# EAGLE board vga_fpga (EAGLE 9.3.0)
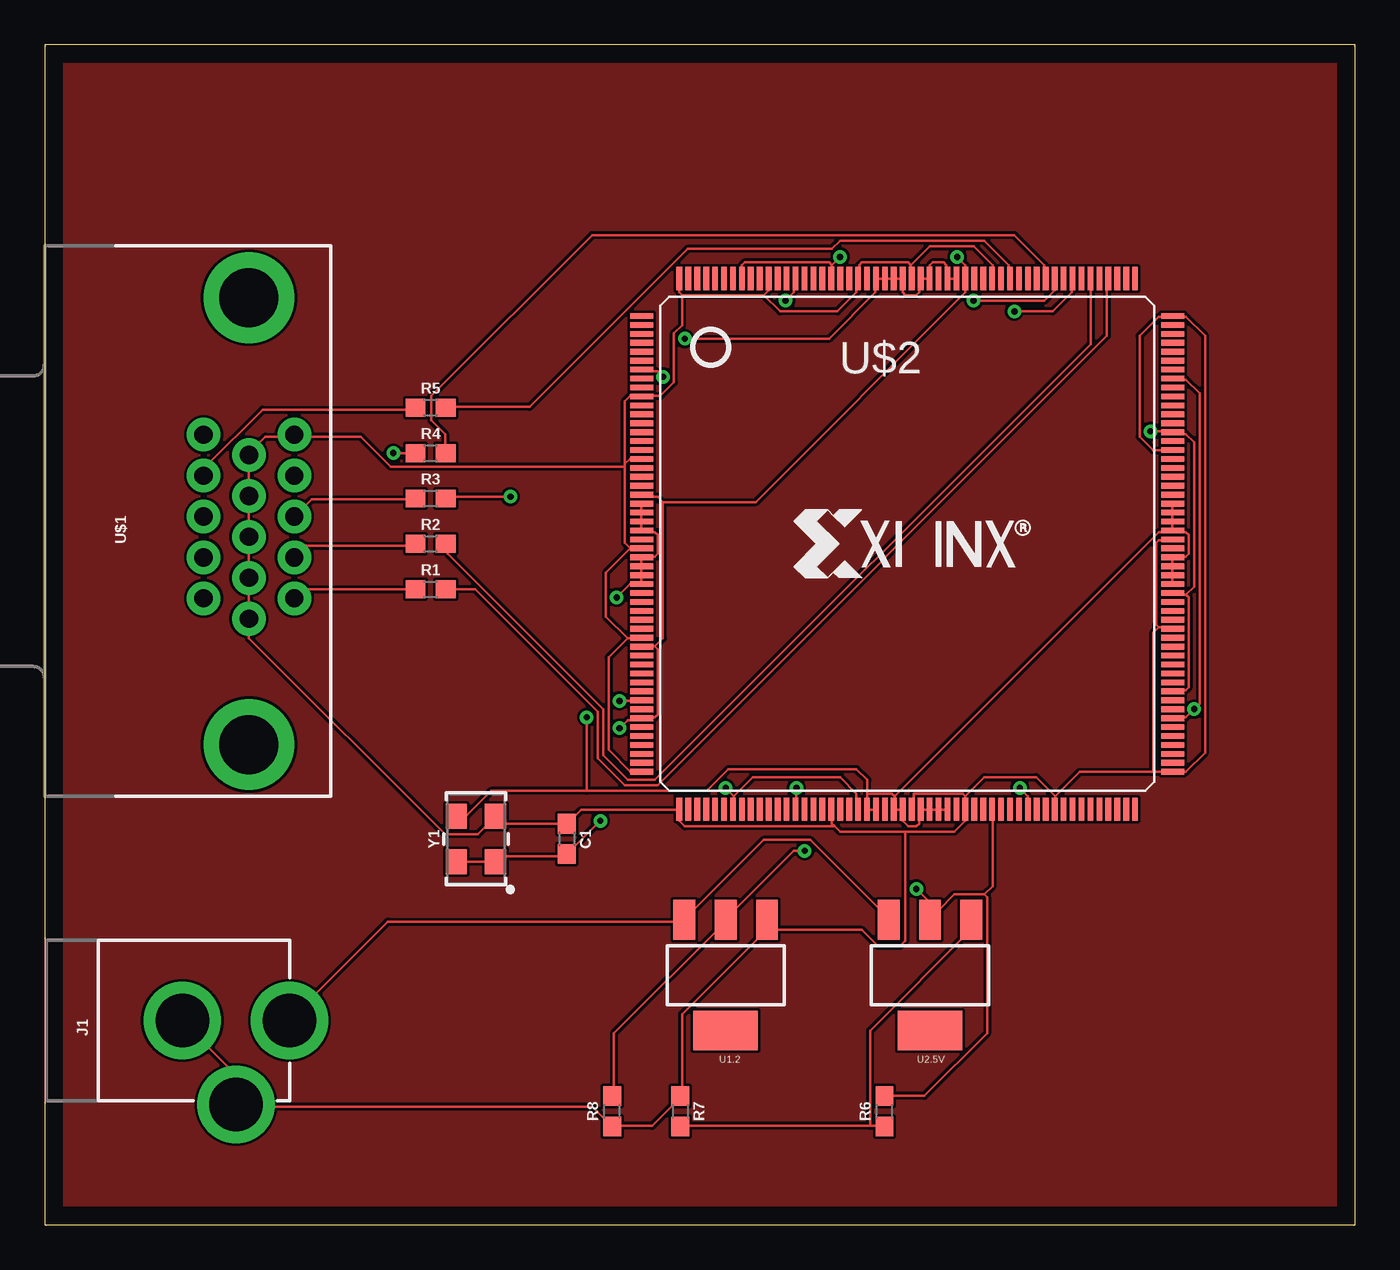
[diagram p0: board, top side]
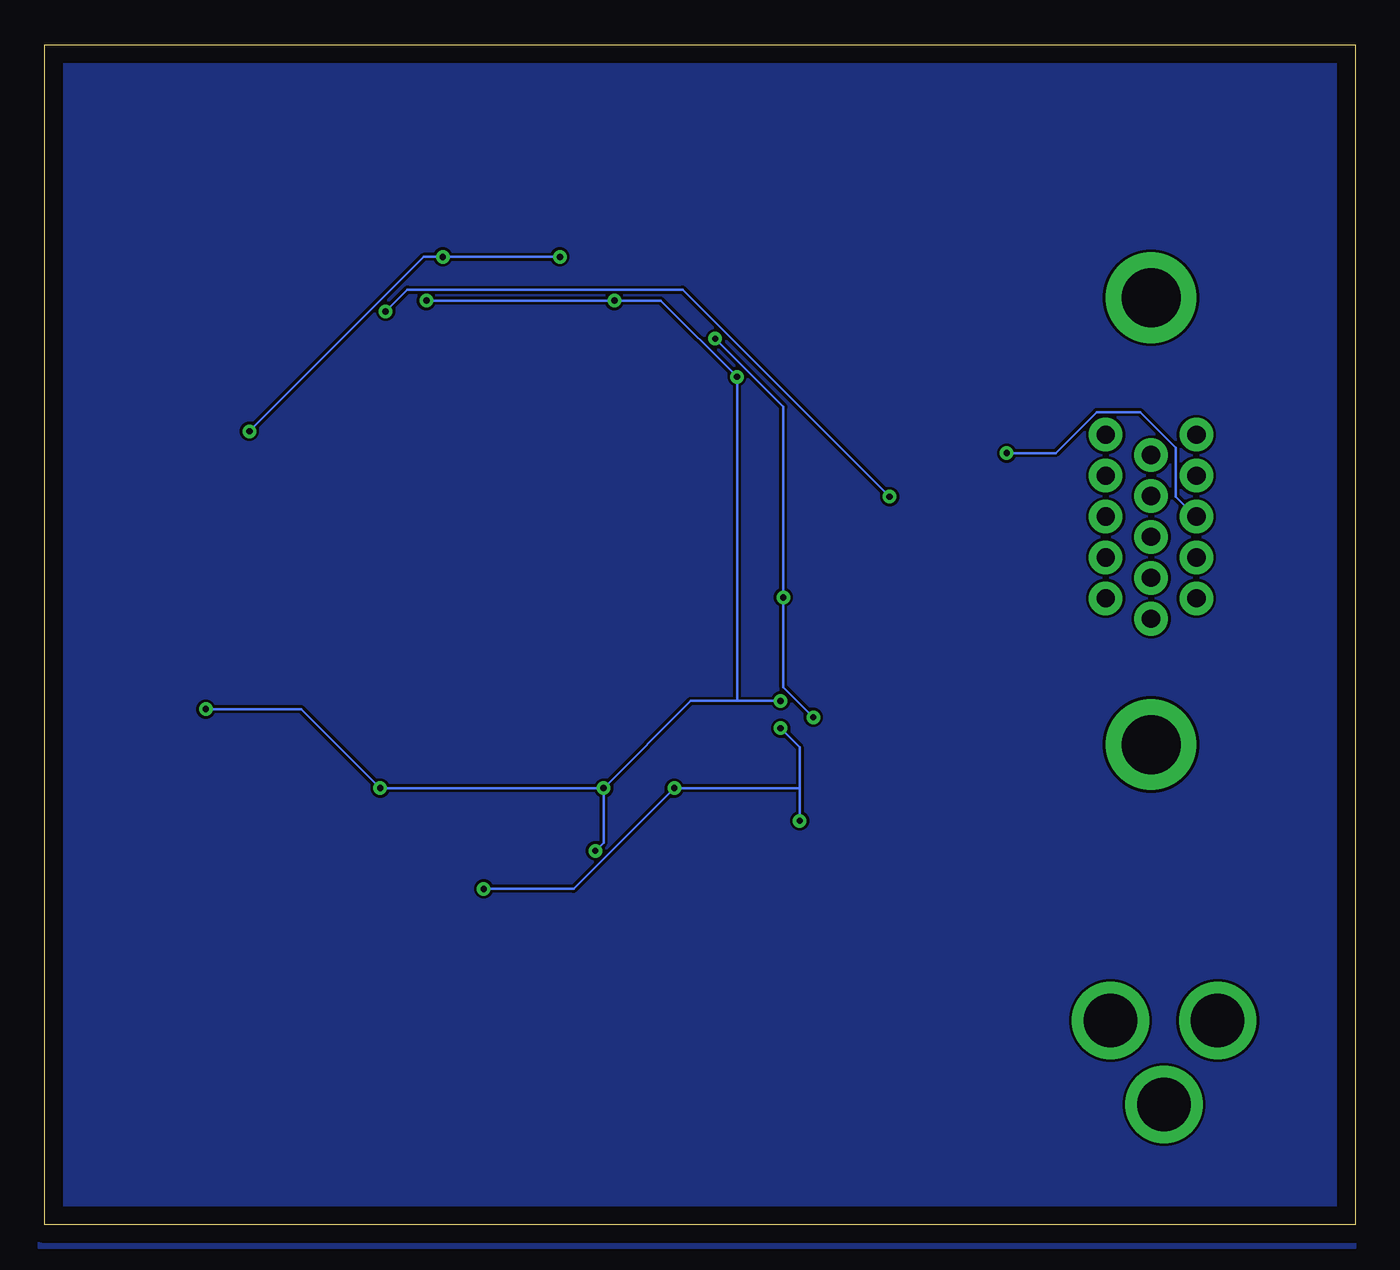
[diagram p1: board, bottom side, seen from below]

Size 73.33 x 66.03 mm. Coordinates in mm from the lower left corner, seen from the top.
Outline: 0,0 73.33,0 73.33,66.03 0,66.03 0,0
Copper layers (1*16): Top 0.035mm / dielectric 1.5mm / Bottom 0.035mm
Design rules "default": minimum track width 6mil, minimum drill 0.35mm, track to track 6mil, track to pad 6mil, pad to pad 6mil, via to via 6mil, smd to smd 6mil, copper to edge 40mil, drill to drill 6mil, minimum pad ring 10mil, minimum via ring 8mil, stop-mask expansion 4mil, vias tented up to drill 0mil, thermal gap 10mil

## Footprints (pad centres in the part's own frame; a part is rotated, then mirrored left to right if it is on the bottom)
0603 = smd 1.1 x 1: 1 -0.85,0; 2 0.85,0
POWER_JACK_PTH = drill 2.997 pad 4.318: GND 0,7.7; GNDBREAK 4.7,10.7; PWR 0,13.7
SOT223 = smd 1.219 x 2.235: 1 -2.311,-3.099; 2 0,-3.099; 3 2.311,-3.099 | smd 3.6 x 2.2: 4 0,3.099
DB15 = drill 1.016 pad 1.88: 1 -4.32,-7.62; 2 -2.03,-7.62; 3 0.26,-7.62; 4 2.55,-7.62; 5 4.84,-7.62; 6 -5.46,-5.08; 7 -3.17,-5.08; 8 -0.88,-5.08; 9 1.41,-5.08; 10 3.7,-5.08; 11 -4.32,-2.54; 12 -2.03,-2.54; 13 0.26,-2.54; 14 2.55,-2.54; 15 4.84,-2.54 | drill 3.302 pad 5.08: G1 -12.5,-5.08; G2 12.5,-5.08
PQ208 = smd 1.3 x 0.32: 1 -14.85,12.75; 2 -14.85,12.25; 3 -14.85,11.75; 4 -14.85,11.25; 5 -14.85,10.75; 6 -14.85,10.25; 7 -14.85,9.75; 8 -14.85,9.25; 9 -14.85,8.75; 10 -14.85,8.25; 11 -14.85,7.75; 12 -14.85,7.25; 13 -14.85,6.75; 14 -14.85,6.25; 15 -14.85,5.75; 16 -14.85,5.25; 17 -14.85,4.75; 18 -14.85,4.25; 19 -14.85,3.75; 20 -14.85,3.25; 21 -14.85,2.75; 22 -14.85,2.25; 23 -14.85,1.75; 24 -14.85,1.25; 25 -14.85,0.75; 26 -14.85,0.25; 27 -14.85,-0.25; 28 -14.85,-0.75; 29 -14.85,-1.25; 30 -14.85,-1.75; 31 -14.85,-2.25; 32 -14.85,-2.75; 33 -14.85,-3.25; 34 -14.85,-3.75; 35 -14.85,-4.25; 36 -14.85,-4.75; 37 -14.85,-5.25; 38 -14.85,-5.75; 39 -14.85,-6.25; 40 -14.85,-6.75; 41 -14.85,-7.25; 42 -14.85,-7.75; 43 -14.85,-8.25; 44 -14.85,-8.75; 45 -14.85,-9.25; 46 -14.85,-9.75; 47 -14.85,-10.25; 48 -14.85,-10.75; 49 -14.85,-11.25; 50 -14.85,-11.75; 51 -14.85,-12.25; 52 -14.85,-12.75; 105 14.85,-12.75; 106 14.85,-12.25; 107 14.85,-11.75; 108 14.85,-11.25; 109 14.85,-10.75; 110 14.85,-10.25; 111 14.85,-9.75; 112 14.85,-9.25; 113 14.85,-8.75; 114 14.85,-8.25; 115 14.85,-7.75; 116 14.85,-7.25; 117 14.85,-6.75; 118 14.85,-6.25; 119 14.85,-5.75; 120 14.85,-5.25; 121 14.85,-4.75; 122 14.85,-4.25; 123 14.85,-3.75; 124 14.85,-3.25; 125 14.85,-2.75; 126 14.85,-2.25; 127 14.85,-1.75; 128 14.85,-1.25; 129 14.85,-0.75; 130 14.85,-0.25; 131 14.85,0.25; 132 14.85,0.75; 133 14.85,1.25; 134 14.85,1.75; 135 14.85,2.25; 136 14.85,2.75; 137 14.85,3.25; 138 14.85,3.75; 139 14.85,4.25; 140 14.85,4.75; 141 14.85,5.25; 142 14.85,5.75; 143 14.85,6.25; 144 14.85,6.75; 145 14.85,7.25; 146 14.85,7.75; 147 14.85,8.25; 148 14.85,8.75; 149 14.85,9.25; 150 14.85,9.75; 151 14.85,10.25; 152 14.85,10.75; 153 14.85,11.25; 154 14.85,11.75; 155 14.85,12.25; 156 14.85,12.75 | smd 0.32 x 1.3: 53 -12.75,-14.85; 54 -12.25,-14.85; 55 -11.75,-14.85; 56 -11.25,-14.85; 57 -10.75,-14.85; 58 -10.25,-14.85; 59 -9.75,-14.85; 60 -9.25,-14.85; 61 -8.75,-14.85; 62 -8.25,-14.85; 63 -7.75,-14.85; 64 -7.25,-14.85; 65 -6.75,-14.85; 66 -6.25,-14.85; 67 -5.75,-14.85; 68 -5.25,-14.85; 69 -4.75,-14.85; 70 -4.25,-14.85; 71 -3.75,-14.85; 72 -3.25,-14.85; 73 -2.75,-14.85; 74 -2.25,-14.85; 75 -1.75,-14.85; 76 -1.25,-14.85; 77 -0.75,-14.85; 78 -0.25,-14.85; 79 0.25,-14.85; 80 0.75,-14.85; 81 1.25,-14.85; 82 1.75,-14.85; 83 2.25,-14.85; 84 2.75,-14.85; 85 3.25,-14.85; 86 3.75,-14.85; 87 4.25,-14.85; 88 4.75,-14.85; 89 5.25,-14.85; 90 5.75,-14.85; 91 6.25,-14.85; 92 6.75,-14.85; 93 7.25,-14.85; 94 7.75,-14.85; 95 8.25,-14.85; 96 8.75,-14.85; 97 9.25,-14.85; 98 9.75,-14.85; 99 10.25,-14.85; 100 10.75,-14.85; 101 11.25,-14.85; 102 11.75,-14.85; 103 12.25,-14.85; 104 12.75,-14.85; 157 12.75,14.85; 158 12.25,14.85; 159 11.75,14.85; 160 11.25,14.85; 161 10.75,14.85; 162 10.25,14.85; 163 9.75,14.85; 164 9.25,14.85; 165 8.75,14.85; 166 8.25,14.85; 167 7.75,14.85; 168 7.25,14.85; 169 6.75,14.85; 170 6.25,14.85; 171 5.75,14.85; 172 5.25,14.85; 173 4.75,14.85; 174 4.25,14.85; 175 3.75,14.85; 176 3.25,14.85; 177 2.75,14.85; 178 2.25,14.85; 179 1.75,14.85; 180 1.25,14.85; 181 0.75,14.85; 182 0.25,14.85; 183 -0.25,14.85; 184 -0.75,14.85; 185 -1.25,14.85; 186 -1.75,14.85; 187 -2.25,14.85; 188 -2.75,14.85; 189 -3.25,14.85; 190 -3.75,14.85; 191 -4.25,14.85; 192 -4.75,14.85; 193 -5.25,14.85; 194 -5.75,14.85; 195 -6.25,14.85; 196 -6.75,14.85; 197 -7.25,14.85; 198 -7.75,14.85; 199 -8.25,14.85; 200 -8.75,14.85; 201 -9.25,14.85; 202 -9.75,14.85; 203 -10.25,14.85; 204 -10.75,14.85; 205 -11.25,14.85; 206 -11.75,14.85; 207 -12.25,14.85; 208 -12.75,14.85
OSCILLATOR-SMD-5X3.2 = smd 1.397 x 1.194: 1 -1.27,-1.1; 2 1.27,-1.1; 3 1.27,1.1; 4 -1.27,1.1

## Placement (x,y rotation side)
C1  0.1uF  [0603]  29.21,21.59 270 top
J1  POWER_JACK  [POWER_JACK_PTH]  0,11.43 270 top
R1  270  [0603]  21.59,35.56 0 top
R2  270  [0603]  21.59,38.1 0 top
R3  270  [0603]  21.59,40.64 0 top
R4  82.5  [0603]  21.59,43.18 0 top
R5  82.5  [0603]  21.59,45.72 0 top
R6  1000  [0603]  46.99,6.35 90 top
R7  1000  [0603]  35.56,6.35 270 top
R8  1000  [0603]  31.75,6.35 90 top
U1.2  V_REG_317SMD  [SOT223]  38.1,13.97 180 top
U2.5V  V_REG_317SMD  [SOT223]  49.53,13.97 180 top
U$1  DB15  [DB15]  6.35,39.37 90 top
U$2  XC3S250/500E-PQ208  [PQ208]  48.26,38.1 0 top
Y1  OSCILLATORSMD-5X3  [OSCILLATOR-SMD-5X3.2]  24.13,21.59 90 top

## Library data of the parts
C1 = SparkFun-Capacitors; PROD_ID: CAP-00810
J1 = SparkFun-Connectors; PROD_ID: CONN-08197
R1-R8 = SparkFun-Resistors
U1.2 U2.5V = SparkFun-IC-Power
U$1 U$2 = SparkFun-Retired
Y1 = SparkFun-Clocks

## Nets
GND: C1.1 J1.GND J1.GNDBREAK R7.1 R8.1 U1.2.1 U$1.5 U$1.6 U$1.7 U$1.8 U$1.9 U$1.10 U$2.10 U$2.17 U$2.27 U$2.37 U$2.52 U$2.53 U$2.70 U$2.79 U$2.85 U$2.95 U$2.105 U$2.121 U$2.131 U$2.141 U$2.156 U$2.173 U$2.182 U$2.188 U$2.198 U$2.208 Y1.2
N$1: J1.PWR U1.2.3 U2.5V.3
N$2: R8.2 U1.2.2 U$2.7 U$2.44 U$2.66 U$2.92 U$2.111 U$2.149 U$2.166 U$2.195
N$3: R1.1 U$1.1
N$4: R2.1 U$1.2
N$5: R6.1 R7.2 U2.5V.1
N$6: C1.2 R6.2 U2.5V.2 U$2.21 U$2.38 U$2.46 U$2.59 U$2.73 U$2.88 U$2.114 U$2.125 U$2.143 U$2.176 U$2.191 U$2.201 Y1.1 Y1.4
N$7: R3.1 U$1.3
N$8: R4.1 U$1.13
N$9: R5.1 U$1.14
N$10: R1.2 U$2.160
N$11: R2.2 U$2.162
N$12: R3.2 U$2.164
N$13: R4.2 U$2.167
N$14: R5.2 U$2.171
N$20: U$2.22 U$2.23 U$2.24 U$2.25 U$2.28 U$2.29 U$2.30 U$2.31 U$2.74 U$2.75 U$2.77 U$2.78 U$2.80 U$2.81 U$2.82 U$2.83 U$2.126 U$2.127 U$2.128 U$2.129 U$2.132 U$2.133 U$2.134 U$2.135 U$2.177 U$2.178 U$2.180 U$2.181 U$2.183 U$2.184 U$2.185 U$2.186 Y1.3

## Tracks (layer width: path | path; a pad name or v marks a point on that pad's centre or on a via)
GND
  Top 0.152: 35.66,52.02 35.51,52.17 35.51,52.93 U$2.208 | 40.23,52.02 35.66,52.02 | 40.23,52.02 40.54,52.32 40.54,52.93 U$2.198 | 48.46,53.7 48.31,53.85 45.72,53.85 45.57,53.7 45.57,53.09 U$2.188 45.41,52.93 45.41,52.17 44.35,51.11 41.15,51.11 40.23,52.02 | 48.46,53.7 48.46,53.09 U$2.182 | 48.46,53.7 49.53,54.76 51.97,54.76 53.03,53.7 53.03,53.09 U$2.173 | 32.61,32.82 31.55,31.75 31.55,26.57 32.77,25.35 33.38,25.35 U$2.52 | 32.61,32.82 33.38,32.82 U$2.37 | 32.77,37.85 33.38,37.85 U$2.27 32.77,37.85 | 32.77,37.85 32.46,38.15 32.46,42.42 | 32.46,42.57 32.46,42.42 | 32.46,42.57 32.77,42.88 33.38,42.88 U$2.17 | 32.46,42.57 32.46,46.08 32.77,46.38 33.38,46.38 U$2.10 33.53,46.38 34.44,46.38 35.2,47.14 35.2,49.89 35.66,50.34 35.66,52.02 | 32.61,32.82 31.39,34.04 31.39,36.47 32.77,37.85 | 32.46,42.42 19.36,42.42 17.68,44.09 14.02,44.09 U$1.5 13.87,44.09 12.34,44.09 11.43,43.18 U$1.10 U$1.9 U$1.8 U$1.7 U$1.6 11.43,32.82 22.4,21.84 24.23,21.84 25.15,22.76 Y1.2 25.3,22.76 25.6,22.45 29.11,22.45 C1.1 29.26,22.45 30.02,23.22 35.51,23.22 | J1.GND 7.77,11.33 10.67,8.43 10.67,6.76 J1.GNDBREAK 10.82,6.6 30.63,6.6 31.7,5.54 R8.1 31.85,5.54 33.98,5.54 35.51,7.06 R7.1 35.66,7.21 35.66,11.79 40.39,16.51 | 40.39,16.51 40.39,16.97 U1.2.1 40.39,16.51 | U$2.141 63.09,43.33 62.03,43.33 61.27,44.09 61.27,49.73 62.33,50.8 63.09,50.8 U$2.156 63.25,50.8 63.86,50.8 64.92,49.73 64.92,26.42 63.86,25.35 63.25,25.35 U$2.105 63.09,25.35 62.03,25.35 | 62.33,33.43 63.09,33.43 U$2.121 | 62.33,33.43 62.18,33.58 62.18,38.15 62.33,38.3 63.09,38.3 U$2.131 | 44.2,22.3 44.5,22 48.16,22 | 44.2,22.3 44.04,22.45 44.04,23.22 U$2.70
  Top 0.152: 48.16,22 50.9,22 51.51,22.61 51.51,23.22 U$2.85 51.51,23.37 51.51,23.98 | 51.51,23.98 51.36,24.13 48.62,24.13 48.62,23.37 U$2.79 | 56.54,23.98 56.54,23.37 U$2.95 | 56.54,23.98 55.47,25.04 52.58,25.04 51.51,23.98 | 62.03,25.35 57.91,25.35 56.54,23.98 | 62.33,33.43 62.03,33.12 62.03,25.35 | 35.51,23.22 35.51,22.61 35.81,22.3 44.2,22.3 | 35.51,23.22 U$2.53 | 40.39,16.51 45.72,16.51 46.63,15.6 47.85,15.6 48.16,15.9 48.16,22
N$1
  Top 0.152: U2.5V.3 47.24,17.12 42.82,21.54 40.23,21.54 35.81,17.12 U1.2.3 35.66,16.97 19.2,16.97 13.72,11.48 J1.PWR
N$2  (via drill 0.35)
  Top 0.152: U$2.111 63.25,28.4 63.86,28.4 v64.31,28.85 64.62,29.16 64.62,46.53 63.86,47.3 63.25,47.3 U$2.149 | R8.2 31.85,7.21 31.85,10.72 38.1,16.97 U1.2.2 38.1,17.12 41.91,20.93 v42.52,20.93 | v42.06,24.44 42.06,23.37 U$2.66 | v32.16,29.31 33.38,29.31 U$2.44 | v34.59,47.45 34.29,47.75 33.53,47.75 U$2.7 | v54.56,24.44 55.02,23.98 55.02,23.37 U$2.92 | v41.45,51.71 41.91,52.17 41.91,52.93 U$2.195 | v51.97,51.71 55.93,51.71 56.54,52.32 56.54,52.93 U$2.166
  Bottom 0.152: v42.06,24.44 42.06,21.39 v42.52,20.93 | 34.59,29.31 37.19,29.31 v42.06,24.44 | 34.59,29.31 v32.16,29.31 | 34.59,29.31 v34.59,47.45 38.86,51.71 v41.45,51.71 v51.97,51.71 | v42.06,24.44 v54.56,24.44 58.98,28.85 v64.31,28.85
N$3
  Top 0.152: R1.1 14.48,35.56 14.02,35.1 U$1.1
N$4
  Top 0.152: R2.1 20.73,38 14.63,38 14.02,37.39 U$1.2
N$5
  Top 0.152: 46.18,5.54 46.94,5.54 R6.1 | 46.18,5.54 35.66,5.54 R7.2 | 46.18,5.54 46.18,10.87 51.82,16.51 51.82,16.97 U2.5V.1
N$6  (via drill 0.35)
  Top 0.152: 52.58,18.49 52.73,18.34 52.73,10.72 49.23,7.21 47.09,7.21 R6.2 | 52.58,18.49 50.9,18.49 49.99,17.58 | 49.99,17.58 49.53,17.12 U2.5V.2 49.99,17.58 | 52.58,18.49 53.03,18.95 53.03,23.22 U$2.88 | 63.86,35.26 64.01,35.1 64.01,30.07 63.86,29.92 63.25,29.92 U$2.114 | 63.86,35.26 63.25,35.26 U$2.125 | 63.86,35.26 64.31,35.71 64.31,43.79 63.86,44.25 63.25,44.25 U$2.143 63.09,44.4 v61.87,44.4 | 38.56,23.98 38.56,23.37 U$2.59 | 38.56,23.98 39.62,25.04 44.5,25.04 45.41,24.13 45.41,23.37 U$2.73 | Y1.4 Y1.1 25.3,20.32 25.6,20.62 29.11,20.62 C1.2 29.26,20.78 v31.09,22.61 | 44.04,53.7 43.89,53.85 39.17,53.85 39.01,53.7 39.01,53.09 U$2.201 | 44.04,53.7 44.04,53.09 U$2.191 | 34.14,32.36 34.29,32.21 34.29,28.55 34.14,28.4 33.53,28.4 U$2.46 33.38,28.25 32.61,28.25 v32.16,27.79 | 34.14,32.36 33.53,32.36 U$2.38 | 34.59,40.44 34.29,40.74 33.53,40.74 U$2.21 | 34.59,40.44 34.59,32.82 34.14,32.36 | 34.59,40.44 39.78,40.44 51.51,52.17 51.51,52.93 U$2.176 51.51,53.09 51.51,53.7 v51.05,54.15 | v44.5,54.15 44.04,53.7 | v38.1,24.44 38.56,23.98 | v48.77,18.8 49.99,17.58
  Bottom 0.152: v44.5,54.15 v51.05,54.15 52.12,54.15 v61.87,44.4 | 31.09,24.44 31.09,26.72 v32.16,27.79 | 31.09,24.44 v31.09,22.61 | 31.09,24.44 v38.1,24.44 43.74,18.8 v48.77,18.8
N$7
  Top 0.152: R3.1 20.73,40.59 14.94,40.59 14.02,39.68 U$1.3
N$8  (via drill 0.35)
  Top 0.152: v19.51,43.18 R4.1
  Bottom 0.152: v19.51,43.18 16.76,43.18 14.48,45.47 12.04,45.47 10.06,43.48 10.06,40.74 8.99,39.68 U$1.13
N$9
  Top 0.152: R5.1 20.73,45.62 12.19,45.62 8.99,42.42 8.99,41.96 U$1.14
N$10
  Top 0.152: R1.2 24.08,35.56 30.94,28.7 30.94,26.11 32.46,24.59 34.29,24.59 59.44,49.73 59.44,52.93 U$2.160
N$11
  Top 0.152: R2.2 22.55,38 22.55,37.54 31.24,28.85 31.24,26.26 32.61,24.89 34.14,24.89 58.52,49.28 58.52,52.93 U$2.162
N$12  (via drill 0.35)
  Top 0.152: v26.06,40.74 22.55,40.74 R3.2 | v54.25,51.11 56.39,51.11 57.45,52.17 57.45,52.93 U$2.164
  Bottom 0.152: v26.06,40.74 37.64,52.32 53.03,52.32 v54.25,51.11
N$13
  Top 0.152: R4.2 22.4,43.18 22.4,44.25 21.64,45.01 21.64,46.38 30.63,55.37 54.25,55.37 55.93,53.7 55.93,53.09 U$2.167
N$14
  Top 0.152: R5.2 22.55,45.77 27.13,45.77 35.97,54.61 44.04,54.61 44.5,55.07 52.58,55.07 53.95,53.7 53.95,53.09 U$2.171
N$20  (via drill 0.35)
  Top 0.152: 48.01,52.93 47.55,52.93 U$2.184 47.4,52.93 47.09,52.93 U$2.185 46.94,52.93 46.63,52.93 U$2.186 46.48,52.93 46.48,52.17 43.89,49.58 v35.81,49.58 | U$2.177 50.9,52.93 50.6,52.93 U$2.178 50.44,53.09 50.44,53.7 50.29,53.85 49.68,53.85 49.53,53.7 49.53,53.09 U$2.180 49.38,52.93 49.07,52.93 U$2.181 48.92,52.93 48.92,52.17 48.77,52.02 48.16,52.02 48.01,52.17 48.01,52.93 | 48.01,52.93 U$2.183 | U$2.126 63.09,35.87 63.09,36.32 U$2.127 63.09,36.47 63.09,36.78 U$2.128 63.09,36.93 63.09,37.24 U$2.129 63.25,37.39 63.86,37.39 64.01,37.54 64.01,38.61 63.86,38.76 63.25,38.76 U$2.132 | U$2.132 63.09,38.91 63.09,39.22 U$2.133 63.09,39.37 63.09,39.83 U$2.134 63.09,39.98 63.09,40.28 U$2.135 | 33.38,35.87 33.38,36.32 U$2.30 33.38,36.47 33.38,36.78 U$2.29 33.38,36.93 33.38,37.24 U$2.28 33.53,37.39 34.14,37.39 34.29,37.54 34.29,38.61 34.14,38.76 33.53,38.76 U$2.25 33.38,38.91 33.38,39.22 U$2.24 33.38,39.37 33.38,39.83 U$2.23 33.38,39.98 33.38,40.28 U$2.22 | U$2.83 50.44,23.22 50.14,23.22 U$2.82 49.99,23.22 49.53,23.22 U$2.81 49.38,23.22 49.07,23.22 U$2.80 48.92,23.22 48.92,22.45 48.77,22.3 48.31,22.3 48.01,22.61 48.01,23.22 | 48.01,23.22 47.55,23.22 U$2.77 47.55,23.37 47.55,23.98 | U$2.75 46.48,23.22 46.02,23.22 U$2.74 46.02,23.37 46.02,24.13 | 30.33,24.28 37.03,24.28 38.25,25.5 45.41,25.5 46.02,24.89 46.02,24.13 | 30.33,24.28 24.99,24.28 23.62,22.91 23.16,22.91 Y1.3 | 47.55,23.98 47.4,24.13 46.02,24.13 | 48.01,23.22 U$2.78 | 33.38,35.87 32.77,35.87 v32,35.1 | 30.33,24.28 v30.33,28.4 | 33.38,35.87 U$2.31 | 47.55,23.98 62.33,38.76 63.09,38.76 U$2.132
  Bottom 0.152: v30.33,28.4 32,30.07 v32,35.1 32,45.77 v35.81,49.58
POLY
  pour Top: 0,66.04 73.66,66.04 73.66,0 0,0
POLY2
  pour Bottom: 0,66.04 73.66,66.04 73.66,-1.27 0,-1.27